# EAGLE board 5mmtermCuringCircuit-NTHP (EAGLE 9.3.0)
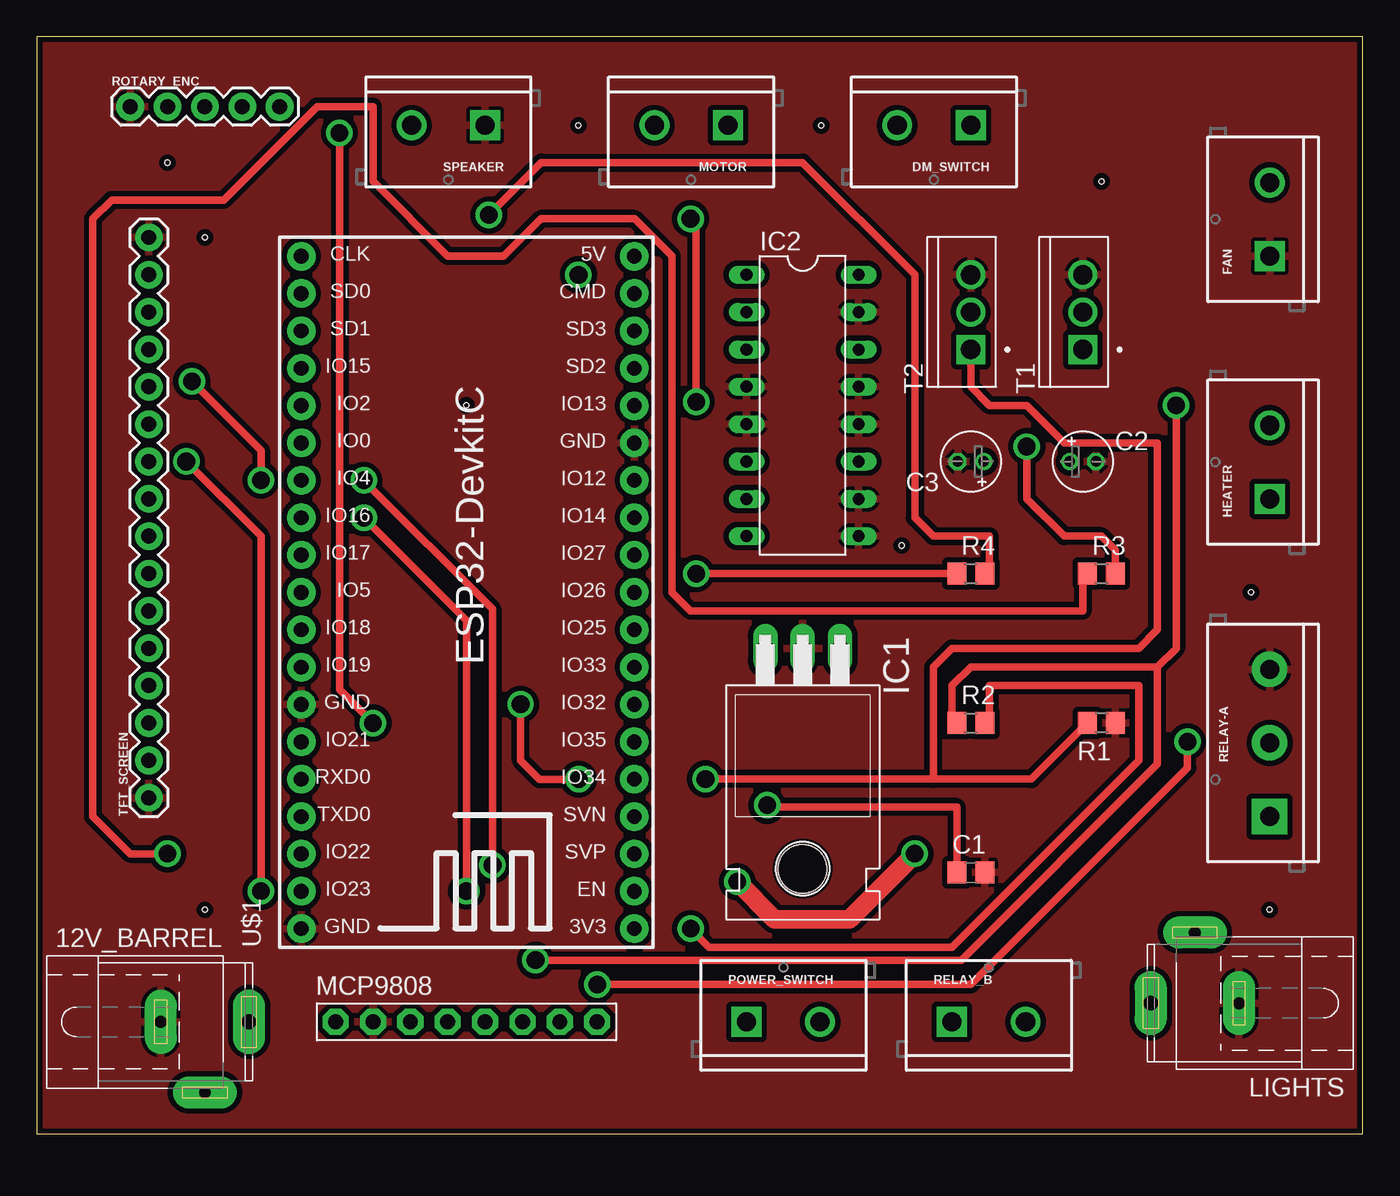
[diagram p0: board, top side]
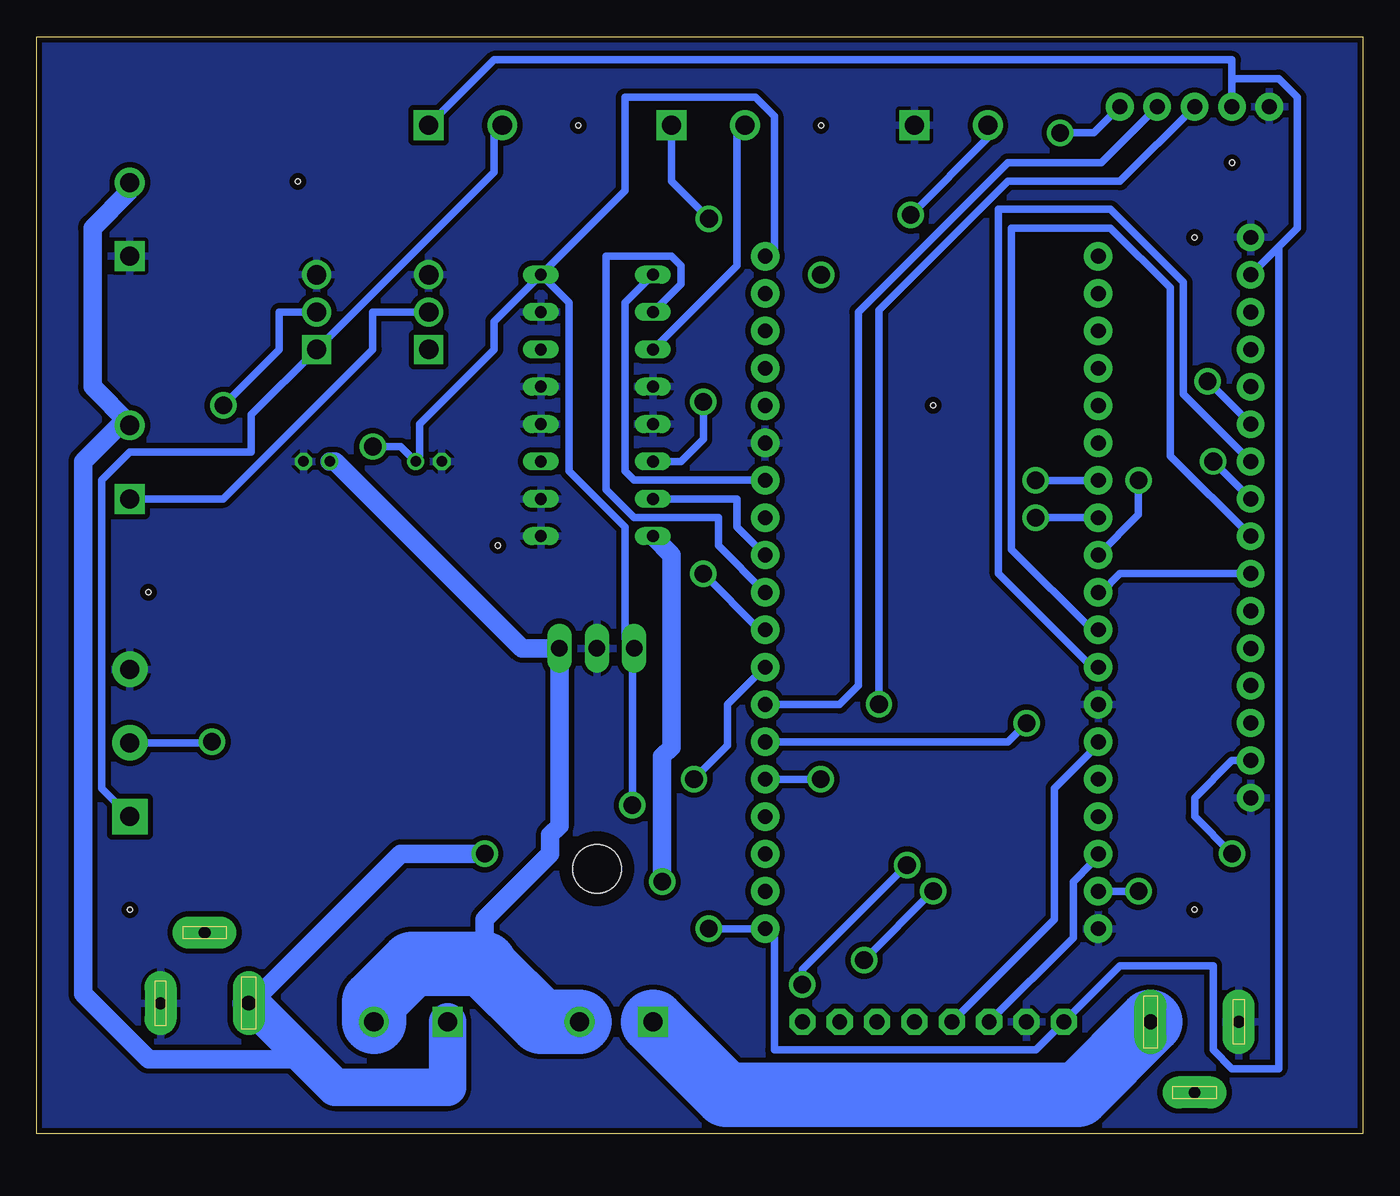
[diagram p1: board, bottom side, seen from below]

Size 90.15 x 74.6 mm. Coordinates in mm from the lower left corner, seen from the top.
Outline: 0,0 90.15,0 90.15,74.6 0,74.6 0,0
Copper layers (1*16): Top 0.0178mm / dielectric 59mil / Bottom 0.0178mm
Design rules "epl-lpkf": minimum track width 8mil, minimum drill 0.35mm, track to track 8mil, track to pad 8mil, pad to pad 8mil, via to via 8mil, smd to smd 8mil, copper to edge 15mil, drill to drill 15mil, minimum pad ring 8mil, minimum via ring 8mil, stop-mask expansion 3mil, vias tented up to drill 0mil, thermal gap 10mil
Net classes: 0 default: width 0.508 mm, drill 1.199 mm, clearance 0.356 mm; 1 thick: width 1.27 mm, drill 1.199 mm, clearance 0.356 mm; 2 high current: width 4.318 mm, drill 1.199 mm, clearance 0.356 mm
Holes 0.35 mm at 8.89,66.04 11.43,60.96 11.43,15.24 29.21,49.53 36.83,68.58 53.34,68.58 72.39,64.77 82.55,36.83 58.8,40.01 83.82,15.24

## Footprints (pad centres in the part's own frame; a part is rotated, then mirrored left to right if it is on the bottom)
SPC4077 = drill 0.8 pad 2.184 long: 1 -3,0; 2 0,-4.8 | drill 1 pad 2.184 long: 3 3,0
C0805 = smd 1.3 x 1.5: 1 -0.95,0; 2 0.95,0
E1,8-4 = drill 0.711 pad 1.168: + -0.889,0 | drill 0.711 pad 1.168 octagon: - 0.889,0
SCREWTERMINAL-5MM-2 = drill 1.3 pad 2.032 square: 1 0,0 | drill 1.3 pad 2.032: 2 5,0
TO220H = drill 1.118 long: 1 -2.54,-10.16; 2 0,-10.16; 3 2.54,-10.16 | hole 3.302: 0,4.826
DIL16 = drill 0.813 long: 1 -8.89,-3.81; 2 -6.35,-3.81; 3 -3.81,-3.81; 4 -1.27,-3.81; 5 1.27,-3.81; 6 3.81,-3.81; 7 6.35,-3.81; 8 8.89,-3.81; 9 8.89,3.81; 10 6.35,3.81; 11 3.81,3.81; 12 1.27,3.81; 13 -1.27,3.81; 14 -3.81,3.81; 15 -6.35,3.81; 16 -8.89,3.81
1X08-BIG = drill 1.016 pad 1.778 octagon: 1 -8.89,0; 2 -6.35,0; 3 -3.81,0; 4 -1.27,0; 5 1.27,0; 6 3.81,0; 7 6.35,0; 8 8.89,0
R0805 = smd 1.3 x 1.5: 1 -0.95,0; 2 0.95,0
SCREWTERMINAL-5MM-3 = drill 1.3 pad 2.413 square: 1 0,0 | drill 1.3 pad 2.413: 2 5,0; 3 10,0
1X05 = drill 1.016 pad 1.88: 1 0,0; 2 2.54,0; 3 5.08,0; 4 7.62,0; 5 10.16,0
TRANS_RFP30N06LE = drill 1.32 square: 1 -2.54,0 | drill 1.32: 2 0,0; 3 2.54,0
1X16 = drill 1.016 pad 1.88: 1 0,0; 2 2.54,0; 3 5.08,0; 4 7.62,0; 5 10.16,0; 6 12.7,0; 7 15.24,0; 8 17.78,0; 9 20.32,0; 10 22.86,0; 11 25.4,0; 12 27.94,0; 13 30.48,0; 14 33.02,0; 15 35.56,0; 16 38.1,0
ESP32-DEVKITC = drill 1 pad 1.93: 1 -22.87,-11.42; 2 -20.33,-11.42; 3 -17.79,-11.42; 4 -15.25,-11.42; 5 -12.71,-11.42; 6 -10.17,-11.42; 7 -7.63,-11.42; 8 -5.09,-11.42; 9 -2.55,-11.42; 10 -0.01,-11.42; 11 2.53,-11.42; 12 5.07,-11.42; 13 7.61,-11.42; 14 10.15,-11.42; 15 12.69,-11.42; 16 15.23,-11.42; 17 17.77,-11.42; 18 20.31,-11.42; 19 22.85,-11.42; 20 22.85,11.23; 21 20.31,11.23; 22 17.77,11.23; 23 15.23,11.23; 24 12.69,11.23; 25 10.15,11.23; 26 7.61,11.23; 27 5.07,11.23; 28 2.53,11.23; 29 -0.01,11.23; 30 -2.55,11.23; 31 -5.09,11.23; 32 -7.63,11.23; 33 -10.17,11.23; 34 -12.71,11.23; 35 -15.25,11.23; 36 -17.79,11.23; 37 -20.33,11.23; 38 -22.87,11.23

## Placement (x,y rotation side)
12V_BARREL  [SPC4077]  11.43,7.62 0 top
C1  0.1uF  [C0805]  63.5,17.78 0 top
C2  10uF  [E1,8-4]  71.12,45.72 0 top
C3  10uF  [E1,8-4]  63.5,45.72 180 top
DM_SWITCH  [SCREWTERMINAL-5MM-2]  63.5,68.58 180 top
FAN  [SCREWTERMINAL-5MM-2]  83.82,59.69 90 top
HEATER  [SCREWTERMINAL-5MM-2]  83.82,43.18 90 top
IC1  7805T  [TO220H]  52.07,22.86 180 top
IC2  L293D  [DIL16]  52.07,49.53 270 top
LIGHTS  [SPC4077]  78.74,8.89 180 top
MCP9808  [1X08-BIG]  29.21,7.62 0 top
MOTOR  [SCREWTERMINAL-5MM-2]  46.99,68.58 180 top
POWER_SWITCH  [SCREWTERMINAL-5MM-2]  48.26,7.62 0 top
R1  10K  [R0805]  72.39,27.94 180 top
R2  10K  [R0805]  63.5,27.94 0 top
R3  220  [R0805]  72.39,38.1 0 top
R4  220  [R0805]  63.5,38.1 0 top
RELAY-A  [SCREWTERMINAL-5MM-3]  83.82,21.59 90 top
RELAY_B  [SCREWTERMINAL-5MM-2]  62.23,7.62 0 top
ROTARY_ENC  [1X05]  6.35,69.85 0 top
SPEAKER  [SCREWTERMINAL-5MM-2]  30.48,68.58 180 top
T1  RFP30N06LE  [TRANS_RFP30N06LE]  71.12,55.88 90 top
T2  RFP30N06LE  [TRANS_RFP30N06LE]  63.5,55.88 90 top
TFT_SCREEN  [1X16]  7.62,22.86 90 top
U$1  ESP32DEVKITC  [ESP32-DEVKITC]  29.21,36.83 90 top

## Library data of the parts
12V_BARREL LIGHTS = con-jack; OC_FARNELL: unknown; OC_NEWARK: unknown
C1 = rcl
C2 C3 = rcl; SPICEPREFIX: C
DM_SWITCH FAN HEATER MOTOR POWER_SWITCH RELAY_B SPEAKER = SparkFun-Connectors; SF_SKU: PRT-08432
IC1 = linear
IC2 = st-microelectronics; MPN: L293D; OC_FARNELL: 9589619; OC_NEWARK: 56P8249
MCP9808 = adafruit
R1-R4 = rcl; SPICEPREFIX: R
RELAY-A = SparkFun-Connectors; PROD_ID: CONN-10134; SF_SKU: PRT-08433
ROTARY_ENC TFT_SCREEN = SparkFun-Connectors
T1 T2 = RFP30N06LE; AVAILABILITY: Unavailable; MF: ON Semiconductor; MP: RFP30N06LE; PACKAGE: TO-220 Intersil; PRICE: None
U$1 = ESP32-DEVKITC

## Nets
12V [thick]: C2.+ IC1.1 POWER_SWITCH.2 RELAY_B.2
GND: 12V_BARREL.1 C1.2 C2.- C3.- FAN.1 IC1.2 IC2.4 IC2.5 IC2.9 IC2.10 IC2.12 IC2.13 IC2.15 LIGHTS.1 MCP9808.2 R1.1 RELAY-A.3 ROTARY_ENC.1 SPEAKER.1 T1.3 T2.3 TFT_SCREEN.1 TFT_SCREEN.16 U$1.14 U$1.32 U$1.38
N$1: C1.1 C3.+ IC1.3 IC2.16 R3.2 U$1.19
N$2: IC2.1 U$1.13
N$3 [thick]: 12V_BARREL.3 POWER_SWITCH.1
N$4: HEATER.1 T2.2
N$5: R1.2 T2.1 U$1.8
N$6: R4.2 SPEAKER.2
N$7: DM_SWITCH.1 MCP9808.1 R2.2 ROTARY_ENC.2 TFT_SCREEN.15 U$1.1
N$8: DM_SWITCH.2 RELAY-A.1 T1.1
N$9: R2.1 T1.2 U$1.27
N$10: MCP9808.3 U$1.36
N$11: MCP9808.4 U$1.33
N$12: IC2.2 U$1.10
N$13: IC2.7 U$1.11
N$14: IC2.3 MOTOR.2
N$15: IC2.6 MOTOR.1
N$16: RELAY-A.2 U$1.26
N$17: R3.1 TFT_SCREEN.2
N$18: ROTARY_ENC.3 U$1.5
N$19: ROTARY_ENC.4 U$1.7
N$20: ROTARY_ENC.5 U$1.6
N$21: TFT_SCREEN.11 U$1.28
N$22: TFT_SCREEN.10 U$1.31
N$23: TFT_SCREEN.9 U$1.37
N$24: TFT_SCREEN.8 U$1.30
N$25: TFT_SCREEN.7 U$1.29
N$26: R4.1 U$1.9
RELAY_NO [thick]: FAN.2 HEATER.2 IC2.8 LIGHTS.3 RELAY_B.1

## Tracks (layer width: path | path; a pad name or v marks a point on that pad's centre or on a via)
12V
  Bottom 1.27: C2.+ 69.85,45.72 57.15,33.02 IC1.1 54.61,20.95 55.24,20.32 55.24,19.05 59.69,14.61 59.69,11.56 59.69,11.43
  Bottom 4.369: POWER_SWITCH.2 55.88,7.62 59.69,11.43 | 59.69,11.56 64.64,11.56 67.23,8.97 RELAY_B.2
GND
  pour Bottom: 0,74.93 90.17,74.93 90.17,0 0,0
  pour Top: 0,74.93 90.17,74.93 90.17,0 0,0
N$1  (via drill 1.2)
  Top 0.508: C1.1 62.55,22.23 49.66,22.23 v49.66,22.35 | R3.2 73.34,39.69 72.39,40.64 69.85,40.64 67.31,43.18 v67.31,46.74
  Bottom 0.508: IC2.16 59.05,55.24 59.05,53.34 64.14,48.26 64.14,45.72 C3.+ 65.41,46.74 v67.31,46.74 | IC2.16 53.98,56.51 53.98,45.09 50.16,41.27 50.16,33.66 IC1.3 49.66,32.89 v49.66,22.35 | IC2.16 50.16,64.13 50.16,70.49 41.27,70.49 40.01,69.22 40.01,59.69 U$1.19
N$2
  Bottom 0.508: IC2.1 50.16,56.51 50.16,45.09 49.53,44.45 U$1.13
N$3
  Bottom 4.369: 12V_BARREL.3 19.38,2.67 43.31,2.67 POWER_SWITCH.1
N$4
  Bottom 0.508: T2.2 67.31,55.88 67.31,53.34 77.47,43.18 HEATER.1
N$5  (via drill 1.2)
  Top 0.508: R1.2 67.63,24.13 60.96,24.13 | 60.96,24.13 v45.47,24.13 | 60.96,24.13 60.96,31.75 62.23,33.02 74.93,33.02 76.2,34.29 76.2,46.99 69.85,46.99 67.31,49.53 64.77,49.53 63.5,50.8 T2.1
  Bottom 0.508: v45.47,24.13 43.18,26.42 43.18,29.21 40.65,31.74 U$1.8
N$6  (via drill 1.2)
  Top 0.508: v30.73,62.48 34.29,66.04 52.07,66.04 59.69,58.42 59.69,41.91 60.96,40.64 64.77,40.64 64.77,38.42 R4.2
  Bottom 0.508: SPEAKER.2 25.48,67.74 v30.73,62.48
N$7  (via drill 1.2)
  Top 0.508: v44.46,13.96 45.72,12.7 62.23,12.7 74.93,25.4 74.93,30.48 64.77,30.48 64.77,27.62 R2.2
  Bottom 0.508: 5.71,60.32 4.45,61.6 4.45,70.49 5.71,71.75 8.89,71.75 | 5.71,60.32 TFT_SCREEN.15 | ROTARY_ENC.2 8.89,71.75 | DM_SWITCH.1 59.05,73.03 8.89,73.03 8.89,71.75 | 5.71,60.32 5.71,4.45 8.89,4.45 10.16,5.71 10.16,11.43 16.51,11.43 MCP9808.1 22.23,5.71 40.01,5.71 40.01,13.34 U$1.1 v44.46,13.96
N$8
  Bottom 0.508: DM_SWITCH.2 59.05,68.58 59.05,65.41 T1.1 75.56,48.9 75.56,46.35 83.82,46.35 85.72,44.45 85.72,23.49 RELAY-A.1
N$9  (via drill 1.2)
  Top 0.508: 76.2,31.75 77.47,33.02 v77.47,49.53 | 76.2,31.75 63.5,31.75 62.23,30.48 62.23,28.26 R2.1 | v33.91,11.81 62.87,11.81 76.2,25.15 76.2,31.75 | v22.23,41.9 29.21,34.92 v29.21,16.51
  Bottom 0.508: T1.2 73.66,55.88 73.66,53.34 v77.47,49.53 | U$1.27 v22.23,41.9 | v29.21,16.51 v33.91,11.81
N$10
  Bottom 0.508: MCP9808.3 19.68,13.34 19.68,17.14 18.41,18.41 U$1.36
N$11
  Bottom 0.508: MCP9808.4 20.95,14.61 20.95,23.49 18.41,26.04 U$1.33
N$12
  Bottom 0.508: IC2.2 46.35,57.79 46.35,59.05 46.99,59.69 51.44,59.69 51.44,43.81 49.53,41.91 43.81,41.91 43.81,40.01 U$1.10
N$13
  Bottom 0.508: IC2.7 42.55,43.18 42.55,41.27 U$1.11
N$14
  Bottom 0.508: IC2.3 42.55,59.05 42.55,68.58 MOTOR.2
N$15  (via drill 1.2)
  Top 0.508: v44.45,62.23 44.83,61.85 v44.83,49.78
  Bottom 0.508: MOTOR.1 46.99,64.77 v44.45,62.23 | IC2.6 46.35,45.72 44.83,47.24 v44.83,49.78
N$16  (via drill 1.2)
  Top 0.508: v38.1,10.16 63.5,10.16 78.23,24.89 v78.23,26.67 | v22.23,44.44 30.99,35.69 v30.99,18.29
  Bottom 0.508: RELAY-A.2 78.31,26.59 v78.23,26.67 | U$1.26 v22.23,44.44 | v38.1,10.16 38.1,11.18 v30.99,18.29
N$17  (via drill 1.2)
  Top 0.508: R3.1 71.12,37.78 71.12,35.56 44.45,35.56 43.18,36.83 43.18,59.69 40.64,62.23 34.29,62.23 31.75,59.69 27.94,59.69 22.86,64.77 22.86,69.85 19.05,69.85 12.7,63.5 5.08,63.5 3.81,62.23 3.81,21.59 6.35,19.05 v8.89,19.05
  Bottom 0.508: v8.89,19.05 11.43,21.59 11.43,22.86 8.89,25.4 TFT_SCREEN.2
N$18  (via drill 1.2)
  Top 0.508: v36.84,24.12 34.17,24.12 32.89,25.4 v32.89,29.21
  Bottom 0.508: ROTARY_ENC.3 16.51,64.77 24.13,64.77 32.89,56.01 v32.89,29.21 | v36.84,24.12 U$1.5
N$19
  Bottom 0.508: ROTARY_ENC.4 17.78,66.04 24.13,66.04 34.29,55.88 34.29,30.48 35.57,29.2 U$1.7
N$20  (via drill 1.2)
  Top 0.508: v20.57,68.07 20.57,30.23 v22.86,27.94
  Bottom 0.508: ROTARY_ENC.5 18.29,68.07 v20.57,68.07 | U$1.6 24.14,26.66 v22.86,27.94
N$21  (via drill 1.2)
  Top 0.508: v15.24,44.45 15.24,46.48 v10.54,51.18
  Bottom 0.508: v10.54,51.18 TFT_SCREEN.11 | U$1.28 15.24,42.1 v15.24,44.45
N$22
  Bottom 0.508: TFT_SCREEN.10 12.19,50.29 12.19,57.91 17.14,62.87 24.77,62.87 24.77,38.1 18.41,31.75 U$1.31
N$23  (via drill 1.2)
  Top 0.508: v10.16,45.72 15.24,40.64 v15.24,16.51 v15.25,16.5
  Bottom 0.508: TFT_SCREEN.9 v10.16,45.72 | v15.25,16.5 U$1.37
N$24
  Bottom 0.508: TFT_SCREEN.8 13.08,46.1 13.08,57.53 17.14,61.6 23.88,61.6 23.88,39.75 18.41,34.29 U$1.30
N$25
  Bottom 0.508: TFT_SCREEN.7 16.51,38.1 17.78,36.83 U$1.29
N$26  (via drill 1.2)
  Top 0.508: R4.1 v44.83,38.1
  Bottom 0.508: v44.83,38.1 41.01,34.28 U$1.9
RELAY_NO  (via drill 1.2)
  Top 1.27: v59.69,19.05 55.24,14.61 50.16,14.61 v47.62,17.14
  Bottom 1.27: FAN.2 83.82,64.13 86.36,61.6 86.36,50.8 83.82,48.26 HEATER.2 84.45,48.26 87,45.72 87,9.52 82.55,5.08 72.39,5.08 72.07,5.4 | LIGHTS.3 75.56,8.89 65.41,19.05 v59.69,19.05 | IC2.8 46.99,39.37 46.99,26.29 47.62,25.65 v47.62,17.14
  Bottom 2.54: 75.56,8.89 72.07,5.4 69.85,3.18 62.23,3.18 RELAY_B.1
S$6  (via drill 1.2)
  other vias: 36.83,58.42